# Altium PCB AlarmTimer_Layout.PcbDoc
Units mm, origin at the board's own origin, x right, y up, seen from the top; angles counter-clockwise.
Board outline 80 x 60 mm, 2 copper layers (Top Layer, Bottom Layer), stack 1.071 mm thick; 26 components, 22 nets, 95 pads, 5 vias.
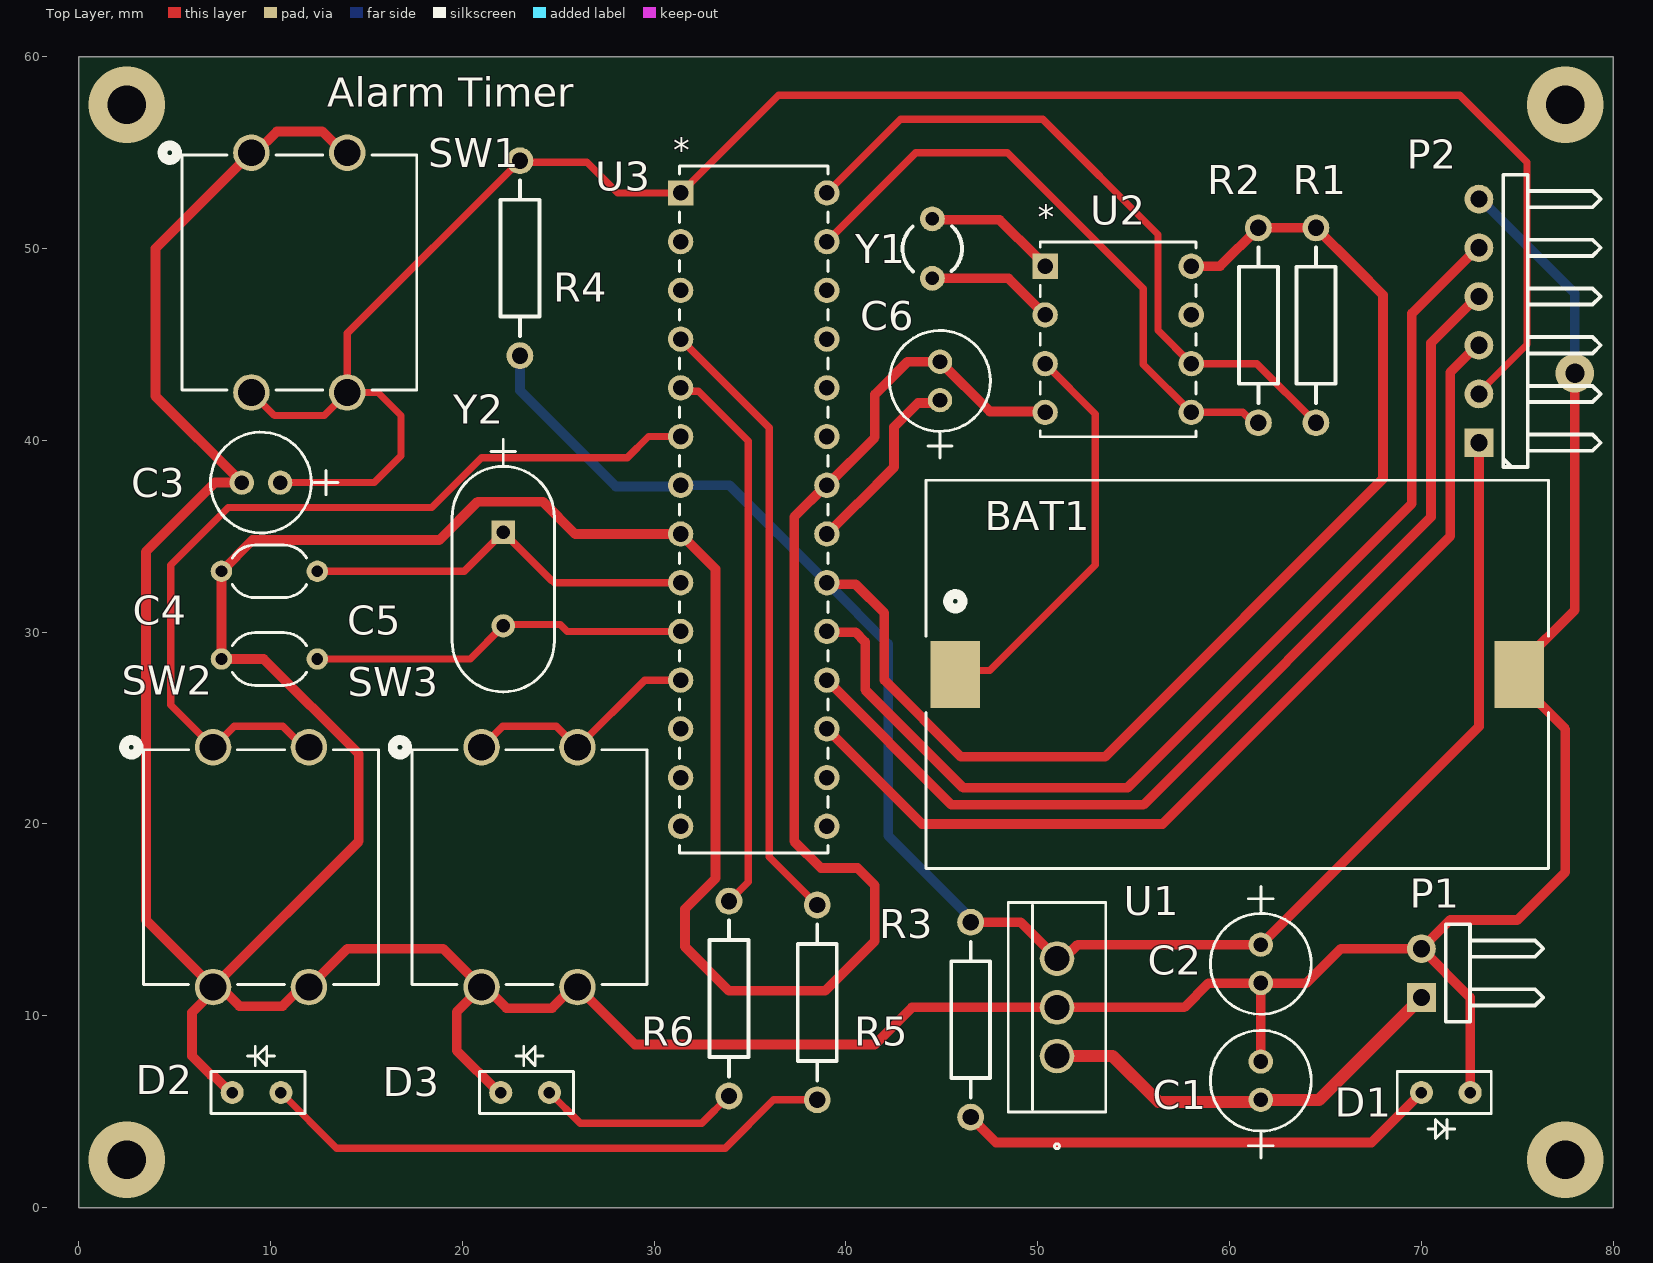
[diagram p0: Top Layer view]
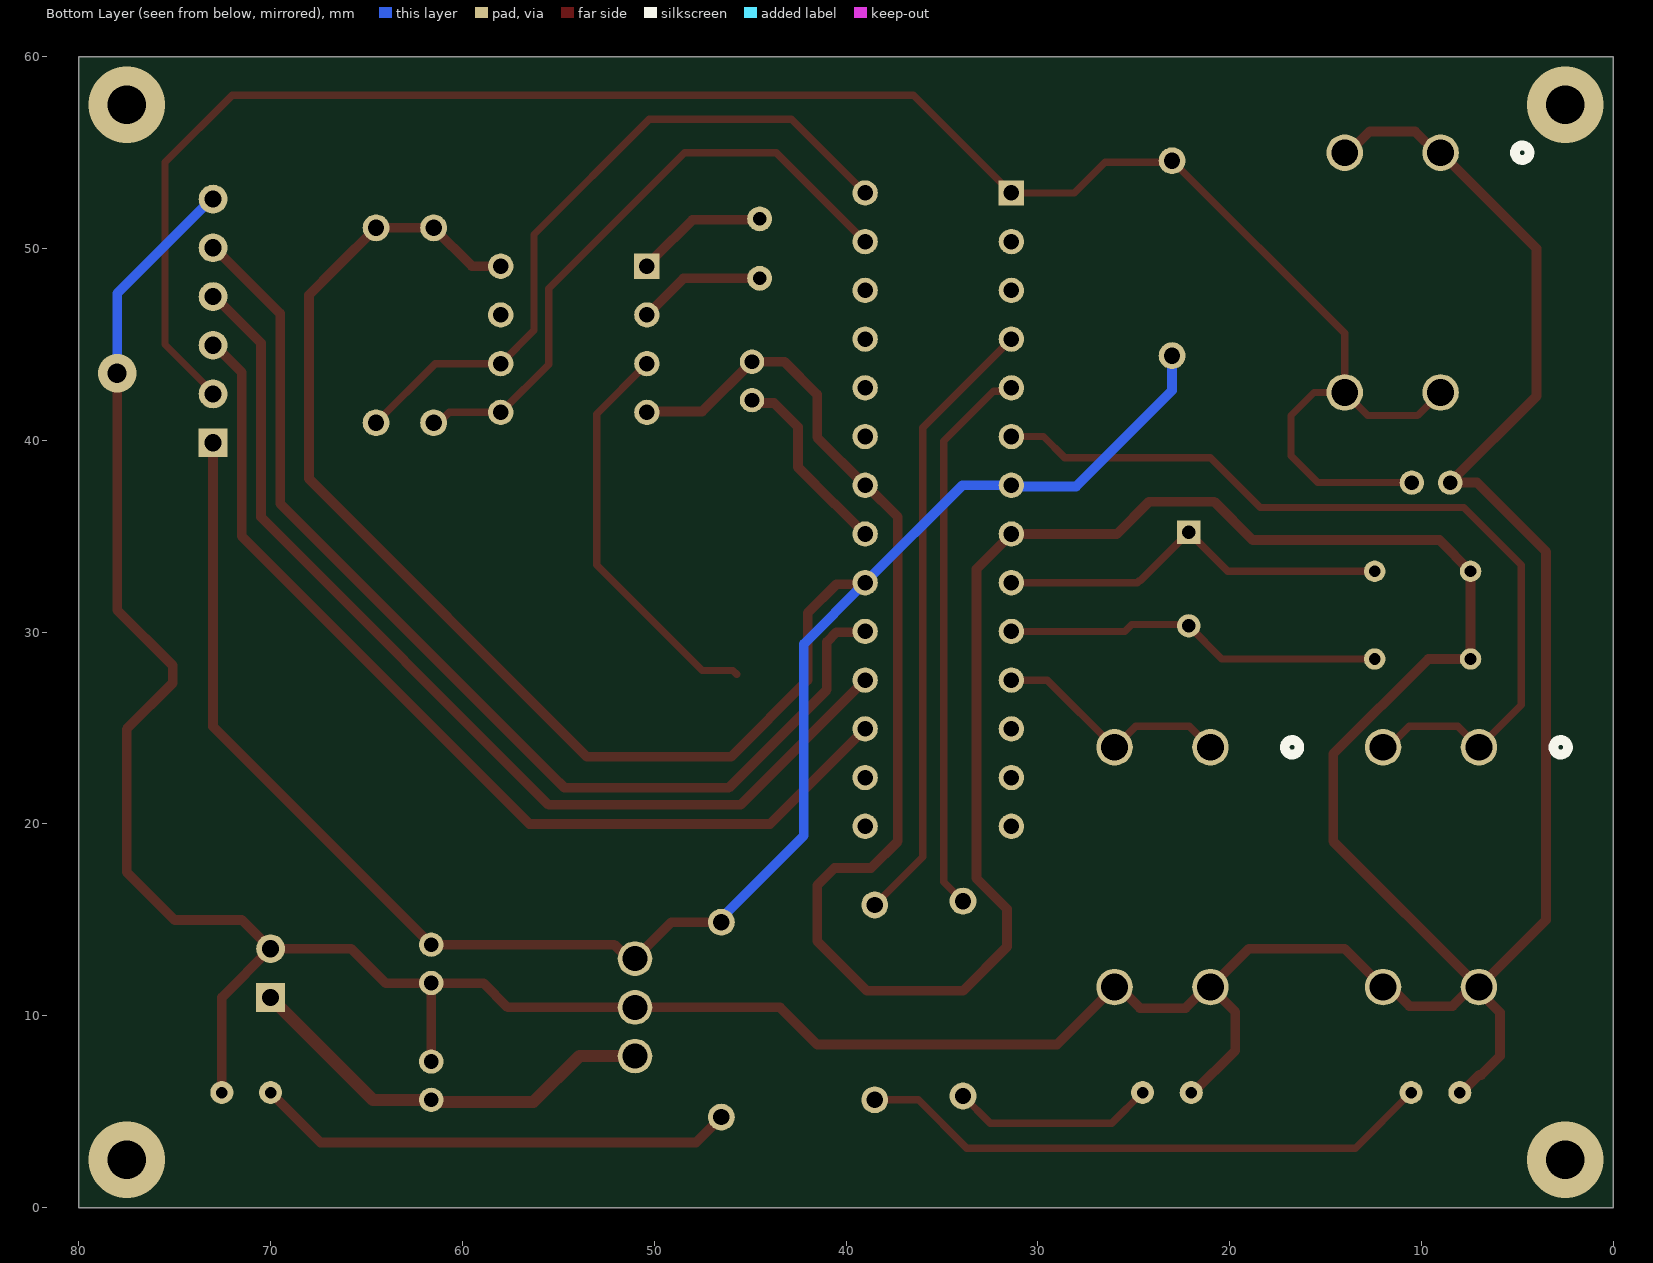
[diagram p1: Bottom Layer view, seen from below]
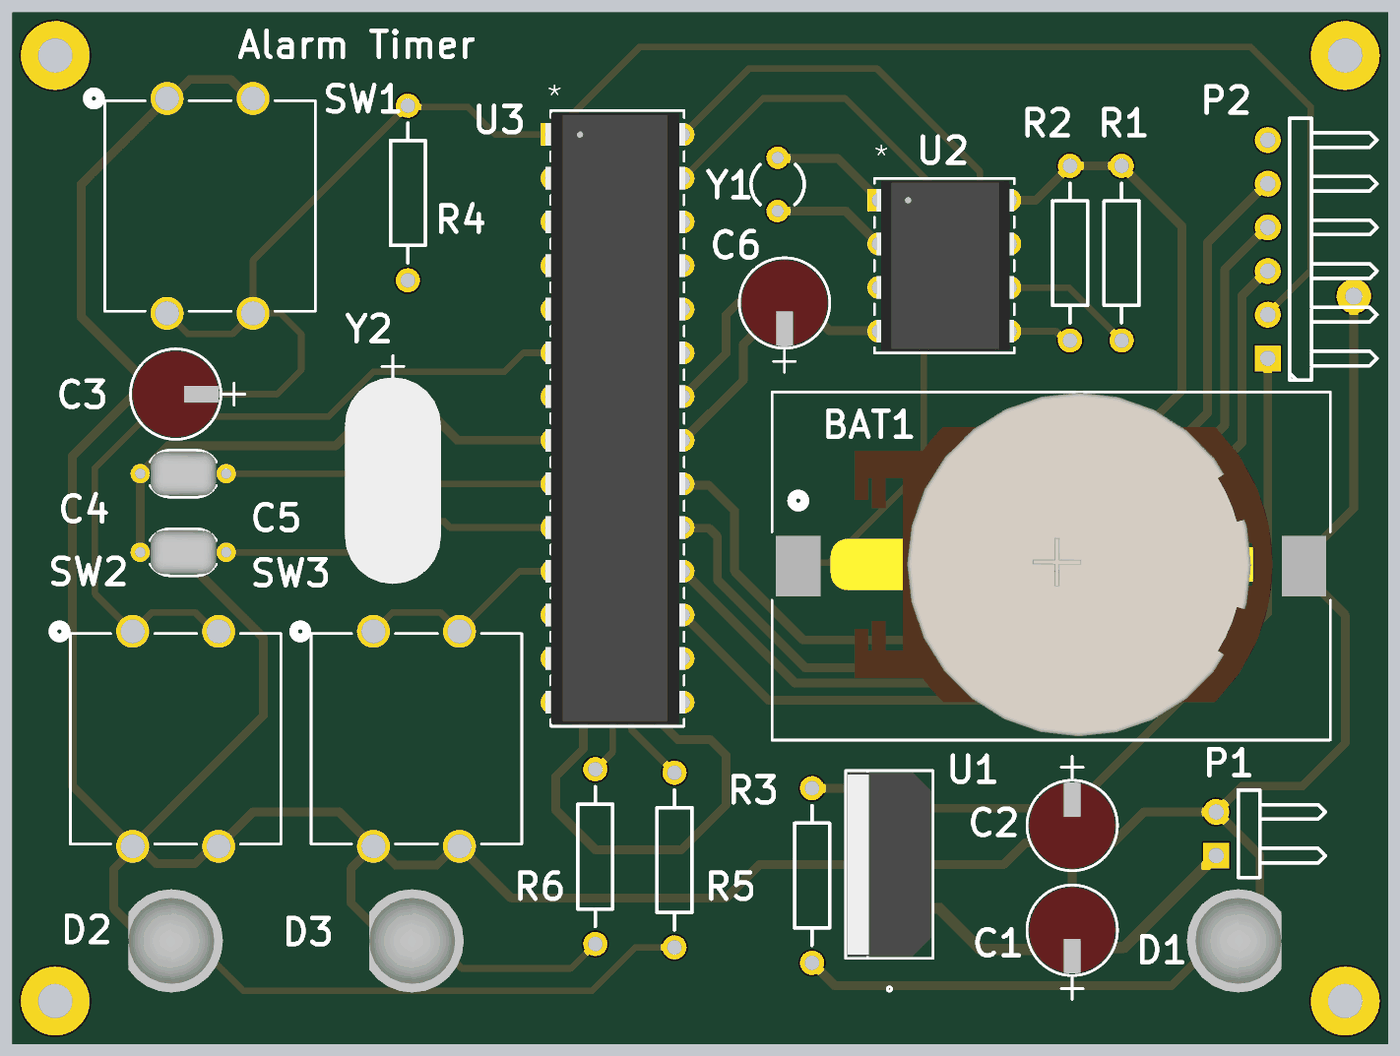
[diagram p2: 3D render of the assembled board from above, using the file's embedded part models]

## Layer stack, top to bottom
Top Solder: solder mask 0.0102, Solder Resist, Dk 3.5
Top Layer: signal copper 0.0356
Dielectric 1: dielectric 1, FR-4, Dk 4.8
Bottom Layer: signal copper 0.0356
Bottom Solder: solder mask 0.0102, Solder Resist, Dk 3.5

## Board outline
0,0 80,0 80,60 0,60

## Design rules (kind name [scope] priority, off if disabled: settings)
Clearance [All] p1: gap=0.203 ignorepadtopadclearanceinfootprint=TRUE
PolygonConnect [All] p1: connectstyle=Relief reliefconductorwidth=0.254 reliefentries=4 polygonreliefangle="90 Angle" airgapwidth=0.254
RoutingVias [All] p1: holewidth=0.711 width=1.27 viastyle="Through Hole" minholewidth=0.711 minwidth=1.27 maxholewidth=3 maxwidth=5
SolderMaskExpansion [All] p1: expansion=0.102 istentingtop=FALSE
Width Width_1 [InNet('5V') or InNet('GND') or InNet('VCC')] p1: maxlimit=0.762 minlimit=0.381 preferedwidth=0.508
Width [All] p2: maxlimit=0.508 minlimit=0.254 preferedwidth=0.381 minimp=50.000000 maximp=50.000000 favimp=50.000000
30 further rules are at their usual default settings.

## Components (designator, comment, footprint, x,y, rotation, side; value= is the part's Value field where it differs from the comment)
BAT1 "CR2032" BAT_SMTU2032_RNB 45.7,27.8 r0 top
C1 "300nF" CAP_UEP_5X11_NCH 61.627,5.615 r90 top
C2 "100nF" CAP_UEP_5X11_NCH 61.627,13.711 r270 top
C3 "100nF" CAP_UEP_5X11_NCH 10.5,37.8 r180 top
C4 "22pF" CAP_FA28_TDK 9.938,33.174 r0 top
C5 "22pF" CAP_FA28_TDK 9.938,28.602 r0 top
C6 "100nF" CAP_UEP_5X11_NCH 44.9,42.1 r90 top
D1 "PowerLED" LED 72.54,6 r180 top
D2 "AlarmLED" LED 8,6 r0 top
D3 "SnoozeLED" LED 22,6 r0 top
P1 "Power Conector" HDR1X2H 70,10.96 r90 top
P2 "USBASP Connector" HDR1X6H 73,39.88 r90 top
R1 "10k" AXIAL-0.4 64.5,46 r270 top
R2 "10k" AXIAL-0.4 61.5,46 r270 top
R3 "" AXIAL-0.4 46.5,9.8 r270 top value=330R
R4 "" AXIAL-0.4 23,49.5 r270 top value=10k
R5 "" AXIAL-0.4 38.5,10.7 r270 top value=220R
R6 "" AXIAL-0.4 33.9,10.9 r270 top value=220R
SW1 "TL1100FF160Q" TL1100F 9,55 r0 top
SW2 "TL1100FF160Q" TL1100F 7,24 r0 top
SW3 "TL1100FF160Q" TL1100F 21,24 r0 top
U1 "LM7805" TO-220_FAS 51,7.9 r90 top
U2 "DS1307" 21-0043D_8_MXM 50.38,49.08 r0 top
U3 "ATMEGA328-PU" 28P3_SPDIP28_SP_MCH 31.38,52.9 r0 top
Y1 "XTAL" R38 44.5,50 r0 top
Y2 "16MHz" XTAL_ABL_ABR 22.13,35.206 r270 top

## Footprints (in the part's own frame and the unit in brackets; to place one, negate y for a bottom-side part, rotate by r counter-clockwise, add the part's x,y. Pads: shape width x height; smd on the part's side, far side on the other; paste and mask are expansions set on the pad)
21-0043D_8_MXM [mil]
  rect 52x52 hole 32 mask+0: 1(0,0)
  round 52 hole 32 mask+0: 2(0,-100) 3(0,-200) 4(0,-300) 5(300,-300) 6(300,-200) 7(300,-100) 8(300,0)
  silkscreen extent -10,-350 310,50, body extent -5,-345 310,45, height 185
28P3_SPDIP28_SP_MCH [mil]
  rect 52x52 hole 32 mask+0: 1(0,0)
  round 52 hole 32 mask+0: 2(0,-100) 3(0,-200) 4(0,-300) 5(0,-400) 6(0,-500) 7(0,-600) 8(0,-700) 9(0,-800) 10(0,-900) 11(0,-1000) 12(0,-1100) 13(0,-1200) 14(0,-1300) 15(300,-1300) 16(300,-1200) 17(300,-1100) 18(300,-1000) 19(300,-900) 20(300,-800) 21(300,-700) 22(300,-600) 23(300,-500) 24(300,-400) 25(300,-300) 26(300,-200) 27(300,-100) 28(300,0)
  silkscreen extent -2,-1355 302,55, body extent -15,-1350 304,50, height 205
AXIAL-0.4 [mm] "Axial Device, Thru-Hole; 2 Leads; 0.4 in Pin Spacing"
  round 1.4 hole 0.85: 1(-5.08,0) 2(5.08,0)
  silkscreen extent -4.06,-1.02 4.06,1.02
BAT_SMTU2032_RNB [mil]
  rect 102x138 smd paste+0 mask+0: 1(0,0) 2(1157.48,0)
  silkscreen extent -60,-398 1218,398, body extent 0,-390 1086,397, height 236
CAP_FA28_TDK [mil]
  round 44 hole 24 mask+0: 1(-98.43,0) 2(98.43,0)
  silkscreen extent -76,-54 76,54, body extent -75,-50 75,50, height 243
CAP_UEP_5X11_NCH [mil]
  round 50 hole 30 mask+0: 1(0,0) 2(78.74,0)
  silkscreen extent -119,-104 143,103, body extent -60,-98 138,98, height 493
HDR1X2H [mm] "Connector; Header; 2 Position; Right Angle"
  rect 1.5x1.5 hole 0.9: 1(0,0)
  round 1.5 hole 0.9: 2(2.54,0)
  silkscreen extent -1.27,-6.35 3.81,-1.27
HDR1X6H [mm] "Connector; Header; 6 Position; Right Angle"
  rect 1.5x1.5 hole 0.9: 1(0,0)
  round 1.5 hole 0.9: 2(2.54,0) 3(5.08,0) 4(7.62,0) 5(10.16,0) 6(12.7,0)
  silkscreen extent -1.27,-6.35 13.97,-1.27
LED [mm]
  round 1.2 hole 0.6: 1(0,0) 2(2.54,0)
  silkscreen extent -1.1,-1.1 3.8,2.4, body extent -1.25,-3 4.25,3, height 8.94
R38 [mm] "Crystal, Thru-Hole; 2 Leads; Body 3.1 x 8.2 mm (Dia.xH)"
  round 1.3 hole 0.7: 1(0,1.55) 2(0,-1.55)
  silkscreen extent -1.55,-1.19 1.55,1.17
TL1100F [mm]
  round 1.905 hole 1.397 mask+0: 1(0,0) 2(0,-12.5) 3(5,0) 4(5,-12.5)
  silkscreen extent -4.64,-12.37 8.62,0.38, body extent -3.59,-13.48 8.41,0.53, height 8.35
TO-220_FAS [mil]
  round 71 hole 51 mask+0: 1(0,0) 2(100,0) 3(200,0)
  silkscreen extent -190,-100 315,100, body extent -110,-95 310,95, height 650
XTAL_ABL_ABR [mil]
  rect 48x48 hole 28 mask+0: 1(0,0)
  round 48 hole 28 mask+0: 2(192,0)
  silkscreen extent -190,-105 328,105, body extent -141,-110 332,110, height 138

## Part data
BAT1: library part SMTU2032, "No Description Available", Built_By=EMA_Justin, Copyright="Copyright (C) 2018 Accelerated Designs. All rights reserved", Datasheet=https://www.mouser.com/datasheet/2/346/SMTU2032-C-258020.pdf, Manufacturer_Part_Number=SMTU2032, RefDes=RefDes, SourceLibrary=Add_to_database_2020-12-24, Type=DEV, Vendor="Renata Batteries"
C1 C2 C3 C6: library part "Cap Pol", "No Description Available", Manufacturer_Part_Number=UFW2A0R1MDD1TD, Built_By=EMA_Cory, Copyright="Copyright (C) 2018 Accelerated Designs. All rights reserved", RefDes=RefDes, SourceLibrary=Nichicon_2019-09-13, Type=DEV, Vendor=Nichicon
C4 C5: library part FA28C0G1H220JNU00, "No Description Available", Built_By=EMA_Matt, Copyright="Copyright (C) 2018 Accelerated Designs. All rights reserved", Manufacturer_Part_Number=FA28C0G1H220JNU00, RefDes=RefDes, SourceLibrary=TDK_2019-10-09, Type=DEV, Vendor=TDK
D1 D2 D3: library part LED
P1: library part "Header 2H", "Header, 2-Pin, Right Angle", LatestRevisionDate=17-Jul-2002, LatestRevisionNote="Re-released for DXP Platform.", Publisher="Altium Limited"
P2: library part "Header 6H", "Header, 6-Pin, Right Angle", LatestRevisionDate=17-Jul-2002, LatestRevisionNote="Re-released for DXP Platform.", Publisher="Altium Limited"
R1 R2 R3 R4 R5 R6: library part Res2, "Resistor", LatestRevisionDate=17-Jul-2002, LatestRevisionNote="Re-released for DXP Platform.", PackageDescription="Axial Device, Thru-Hole; 2 Leads; 0.4 in Pin Spacing", PackageReference=AXIAL-0.4, Published=8-Jun-2000, Publisher="Altium Limited"
SW1 SW2 SW3 U3: "No Description Available", Built_By=EMA_Cory, Copyright="Copyright (C) 2018 Accelerated Designs. All rights reserved", RefDes=RefDes, Type=DEV
  SW1 SW2 SW3: Datasheet=https://sten-eswitch-13110800-production.s3.amazonaws.com/system/asset/product_line/data_sheet/143/TL1100.pdf, Manufacturer_Part_Number=TL1100FF160Q, SourceLibrary=E-Switch_2020-03-31, Vendor=E-Switch
  U3: Datasheet=https://ww1.microchip.com/downloads/en/DeviceDoc/ATmega48A-PA-88A-PA-168A-PA-328-P-DS-DS40002061B.pdf, Manufacturer_Part_Number=ATMEGA328-PU, SourceLibrary=Update_to_database_2021-05-13, Vendor=Microchip
U1: library part LM7805CT, "No Description Available", Built_By=EMA_UL_Team, Copyright="Copyright (C) 2018 Accelerated Designs. All rights reserved", Manufacturer_Part_Number=LM7805CT, RefDes=RefDes, SourceLibrary=Fairchild_2008-01-01_, Type=DEV, Vendor="Fairchild Semiconductor"
U2: library part DS1307+, "No Description Available", Built_By=EMA_UL_Team, Copyright="Copyright (C) 2018 Accelerated Designs. All rights reserved", Manufacturer_Part_Number=DS1307+, RefDes=RefDes, SourceLibrary=Maxim_2011-05-13, Type=DEV, Vendor="Maxim Integrated Products"
Y1: "Crystal Oscillator", LatestRevisionDate=17-Jul-2002, LatestRevisionNote="Re-released for DXP Platform.", PackageDescription="Crystal, Thru-Hole; 2 Leads; Body 3.1 x 8.2 mm (Dia.xH)", PackageReference=R38, Published=8-Jun-2000, Publisher="Altium Limited"
Y2: "No Description Available", Manufacturer_Part_Number=ABL-20.000MHZ-B2, Built_By=EMA_Cory, Copyright="Copyright (C) 2018 Accelerated Designs. All rights reserved", Datasheet=https://abracon.com/Resonators/ABL.pdf, RefDes=RefDes, SourceLibrary=Add_to_database_2020-12-08, Type=DEV, Vendor=Abracon

## Via types
v1: diameter 4, hole 2, Top Layer to Bottom Layer, 4 vias
v2: diameter 2, hole 1, Top Layer to Bottom Layer, 1 vias

## Nets (pads, with @x,y where several pads share a name; then routed paths per layer and width w, separated by ;. In a path a pad name is that pad's centre, name@x,y a point inside that pad or via, vN(x,y) a via of type N, cw(c..) or ccw(c..) an arc to the next point about the centre after c; other vN are vias at no path point)
5V: C2.1 P2.1 R1.1 R2.1 R3.1 R4.2 U1.3 U2.8 U3.7 U3.20 | length 152.8
  Top Layer w0.508: R4.2 R4.2@23.127,44.42 ; U3.20 39.08,32.5 40.5,32.5 42,31 42,27.5 46,23.5 53.5,23.5 68,38 68,47.58 66.58,49 R1.1 R2.1 59.5,49.08 U2.8 ; R3.1 49.1,14.88 U1.3 51.351,12.98 52.082,13.711 C2.1 73,25.084 P2.1@73,39.96
  Bottom Layer w0.508: R4.2 23,42.6 28,37.6 31.32,37.6 U3.7 33.92,37.66 U3.20 42.2,29.38 42.2,19.4 46.5,15.1 R3.1
ALARM_LED: R5.1 U3.4 | length 32.4
  Top Layer w0.381: U3.4 36,40.66 36,18.28 R5.1
GND: BAT1.2 C1.2 C2.2 C3.2 C4.1 C5.1 C6.2 D1.1 D2.1 D3.1 P1.2 P2.6 SW1.1 SW1.3 SW2.2 SW2.4 SW3.2 SW3.4 U1.2 U2.4 U3.8 U3.22 | length 336.4
  Top Layer w0.508: D2.1 7.904,6 6.989,6.915 6.885,6.915 5.9,7.9 5.9,10.175 7,11.275 SW2.2 ; SW1.3 13.8,55 12.7,56.1 10.325,56.1 9.225,55 SW1.1 4,50 4,42.3 C3.2 7.1,37.8 3.5,34.2 3.5,15 SW2.2 ; D3.1 21.898,6 19.7,8.198 19.7,10.2 SW3.2 ; U2.4 50.34,41.5 47.5,41.5 C6.2 43.2,44.1 41.5,42.4 41.5,40.16 U3.22 38.96,37.66 37.3,36 37.3,19.1 38.7,17.7 40.6,17.7 41.5,16.8 41.5,13.9 38.9,11.3 33.9,11.3 31.6,13.6 31.6,15.568 33.2,17.168 33.2,33.3 U3.8 25.882,35.12 24.202,36.8 20.8,36.8 18.8,34.8 9.064,34.8 C4.1 C5.1 9.643,28.602 14.6,23.645 14.6,19.1 SW2.2 ; C1.2 C2.2 ; D1.1 72.54,10.96 P1.2 ; v2(78,43.5) 78,31.157 75.1,28.257 BAT1.2 75.1,27.343 77.5,24.943 77.5,17.5 75,15 71.5,15 P1.2 ; SW2.2 7.378,11.5 8.378,10.5 10.622,10.5 11.622,11.5 SW2.4 14,13.5 19,13.5 SW3.2 ; SW3.2 21.2,11.5 22.3,10.4 24.675,10.4 25.775,11.5 SW3.4 29,8.5 41.5,8.5 43.44,10.44 U1.2 57.64,10.44 58.9,11.7 61.616,11.7 C2.2 ; C2.2 61.638,11.7 64,11.7 65.8,13.5 P1.2
  Bottom Layer w0.508: P2.6@73.08,52.58 78,47.66 v2(78,43.5)
MISO: P2.4 U3.18 | length 53
  Top Layer w0.508: U3.18 45.5,21 55.5,21 70.5,36 70.5,45.08 P2.4@73,47.58
MOSI: P2.3 U3.17 | length 51.4
  Top Layer w0.508: U3.17 43.96,20 56.5,20 71.5,35 71.5,43.54 P2.3@73,45.04
NetBAT1_1: BAT1.1 U2.3 | length 21.2
  Top Layer w0.381: BAT1.1 45.9,28 47.5,28 53,33.5 53,41.38 U2.3
NetC4_2: C4.2 U3.9 Y2.1 | length 20.9
  Top Layer w0.381: C4.2 20.098,33.174 Y2.1 24.636,32.7 24.7,32.7 24.82,32.58 U3.9
NetC5_2: C5.2 U3.10 Y2.2 | length 19.8
  Top Layer w0.381: C5.2 20.403,28.602 Y2.2 22.201,30.4 25.1,30.4 25.46,30.04 U3.10
NetC6_1: C6.1 U3.21 | length 10
  Top Layer w0.508: U3.21 40.568,36.688 40.588,36.688 42.5,38.6 42.5,40.7 43.754,41.954 44.754,41.954 C6.1
NetD1_2: D1.2 R3.2 | length 25.1
  Top Layer w0.508: R3.2 47.82,3.4 67.4,3.4 D1.2
NetD2_2: D2.2 R5.2 | length 30.2
  Top Layer w0.381: D2.2 13.44,3.1 33.7,3.1 36.22,5.62 R5.2
NetD3_2: D3.2 R6.2 | length 10.6
  Top Layer w0.381: D3.2 26.14,4.4 32.48,4.4 R6.2
NetU2_1: U2.1 Y1.1 | length 6.9
  Top Layer w0.508: Y1.1 44.55,51.5 48,51.5 49.974,49.526 49.974,49.486 U2.1
NetU2_2: U2.2 Y1.2 | length 6.7
  Top Layer w0.508: Y1.2 48.47,48.45 U2.2
RESET: C3.1 P2.2 R4.1 SW1.2 SW1.4 U3.1 | length 103.9
  Top Layer w0.381: SW1.2 10.2,41.3 12.8,41.3 SW1.4 ; C3.1 15.4,37.8 16.8,39.2 16.8,41.3 15.6,42.5 SW1.4 ; P2.2@73,42.5 75.5,45 75.5,54.5 72,58 36.48,58 U3.1 28.1,52.9 26.5,54.5 23.08,54.5 R4.1 14,45.58 SW1.4
SCK: P2.5 U3.19 | length 56.3
  Top Layer w0.508: U3.19 39.04,30 40.5,30 41,29.5 41,27 46.111,21.889 54.687,21.889 55.298,22.5 69.5,36.702 69.5,46.62 P2.5@73,50.12
SCL: R1.2 U2.6 U3.28 | length 36.6
  Top Layer w0.381: U3.28 42.838,56.738 50.262,56.738 56.262,50.738 56.262,45.738 U2.6 61.42,44 R1.2
SDA: R2.2 U2.5 U3.27 | length 32.6
  Top Layer w0.381: U3.27 43.64,55 48.422,55 55.5,47.922 55.5,43.96 U2.5 60.684,41.46 61.224,40.92 R2.2
SNOOZE_BTN: SW3.1 SW3.3 U3.11 | length 14.4
  Top Layer w0.381: SW3.1@21.127,24.127 22.1,25.1 ; SW3.1@21.254,24 SW3.1 22.1,25.1 ; U3.11 29.5,27.5 SW3.3 24.9,25.1 22.1,25.1
SNOOZE_LED: R6.1 U3.5 | length 29.1
  Top Layer w0.381: U3.5 31.56,42.56 32.307,42.56 34.9,39.967 34.9,16.98 R6.1
STOP_BTN: SW2.1 SW2.3 U3.6 | length 45.7
  Top Layer w0.381: SW2.3 11.733,24 10.633,25.1 8.1,25.1 SW2.1 4.8,26.2 4.8,33.5 7.8,36.5 18.4,36.5 21,39.1 28.6,39.1 29.7,40.2 U3.6
VCC: C1.1 P1.1 U1.1 | length 22.3
  Top Layer w0.635: U1.1 53.9,7.9 56.3,5.5 61.512,5.5 C1.1 64.655,5.615 P1.1
pads on no net: U2.7 U3.2 U3.3 U3.12 U3.13 U3.14 U3.15 U3.16 U3.23 U3.24 U3.25 U3.26
copper on no net:
  other v1: 2.5,2.5 77.5,2.5 2.5,57.5 77.5,57.5

## Silkscreen, mask and mechanical layers (free items; w line width, h text height)
Top Overlay:
  text "Alarm Timer" at 12.954,57.404 h1.52

## Text inside footprints (layer, text, board x,y; h text height)
U1: Mechanical 13 "TAB" at 49.537,9.964 h0.64 r90
U2: Top Overlay "*" at 50,51 h1.27; Mechanical 13 "*" at 50.19,48.445 h1.27
U3: Top Overlay "*" at 31,54.5 h1.27; Mechanical 13 "*" at 31.38,52.265 h1.27